# Altium PCB PH.PcbDoc
Units mm, origin at the board's own origin, x right, y up, seen from the top; angles counter-clockwise.
Board outline 50.1 x 34.1 mm, 2 copper layers (Top Layer, Bottom Layer); 44 components, 27 nets, 148 pads, 87 vias.
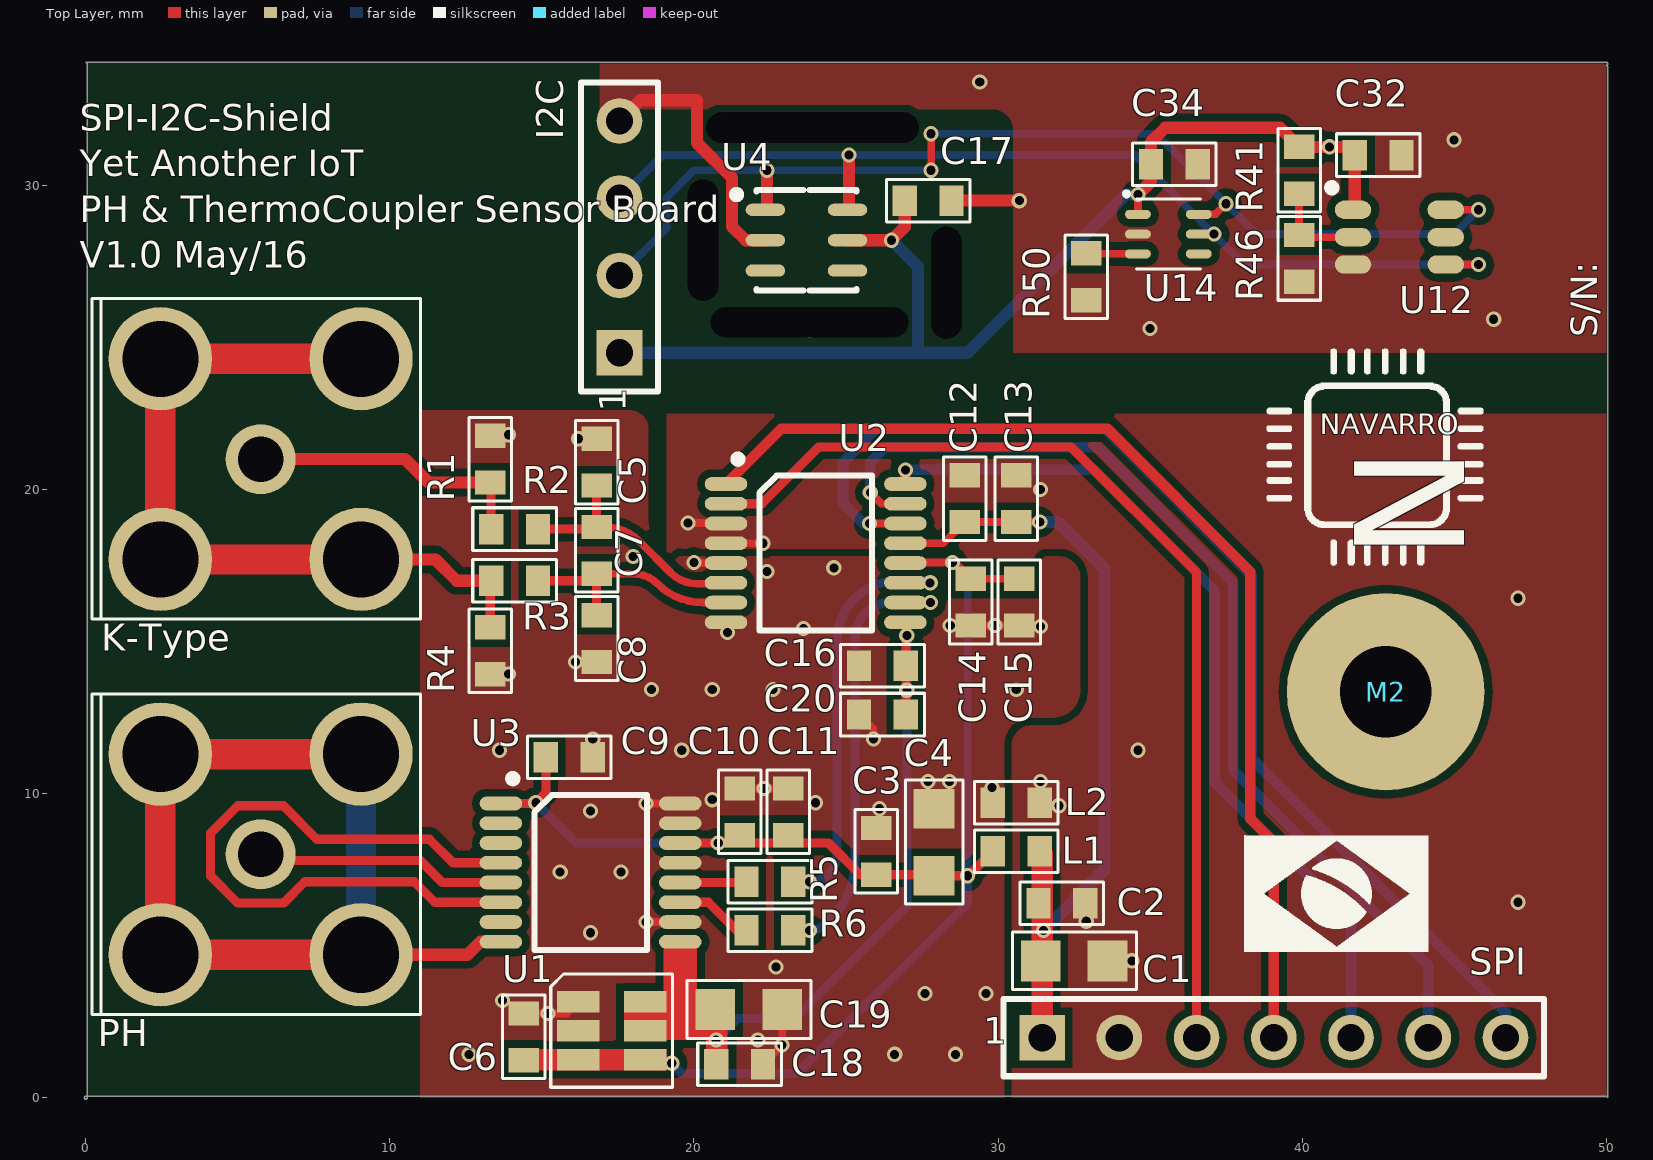
[diagram p0: Top Layer view]
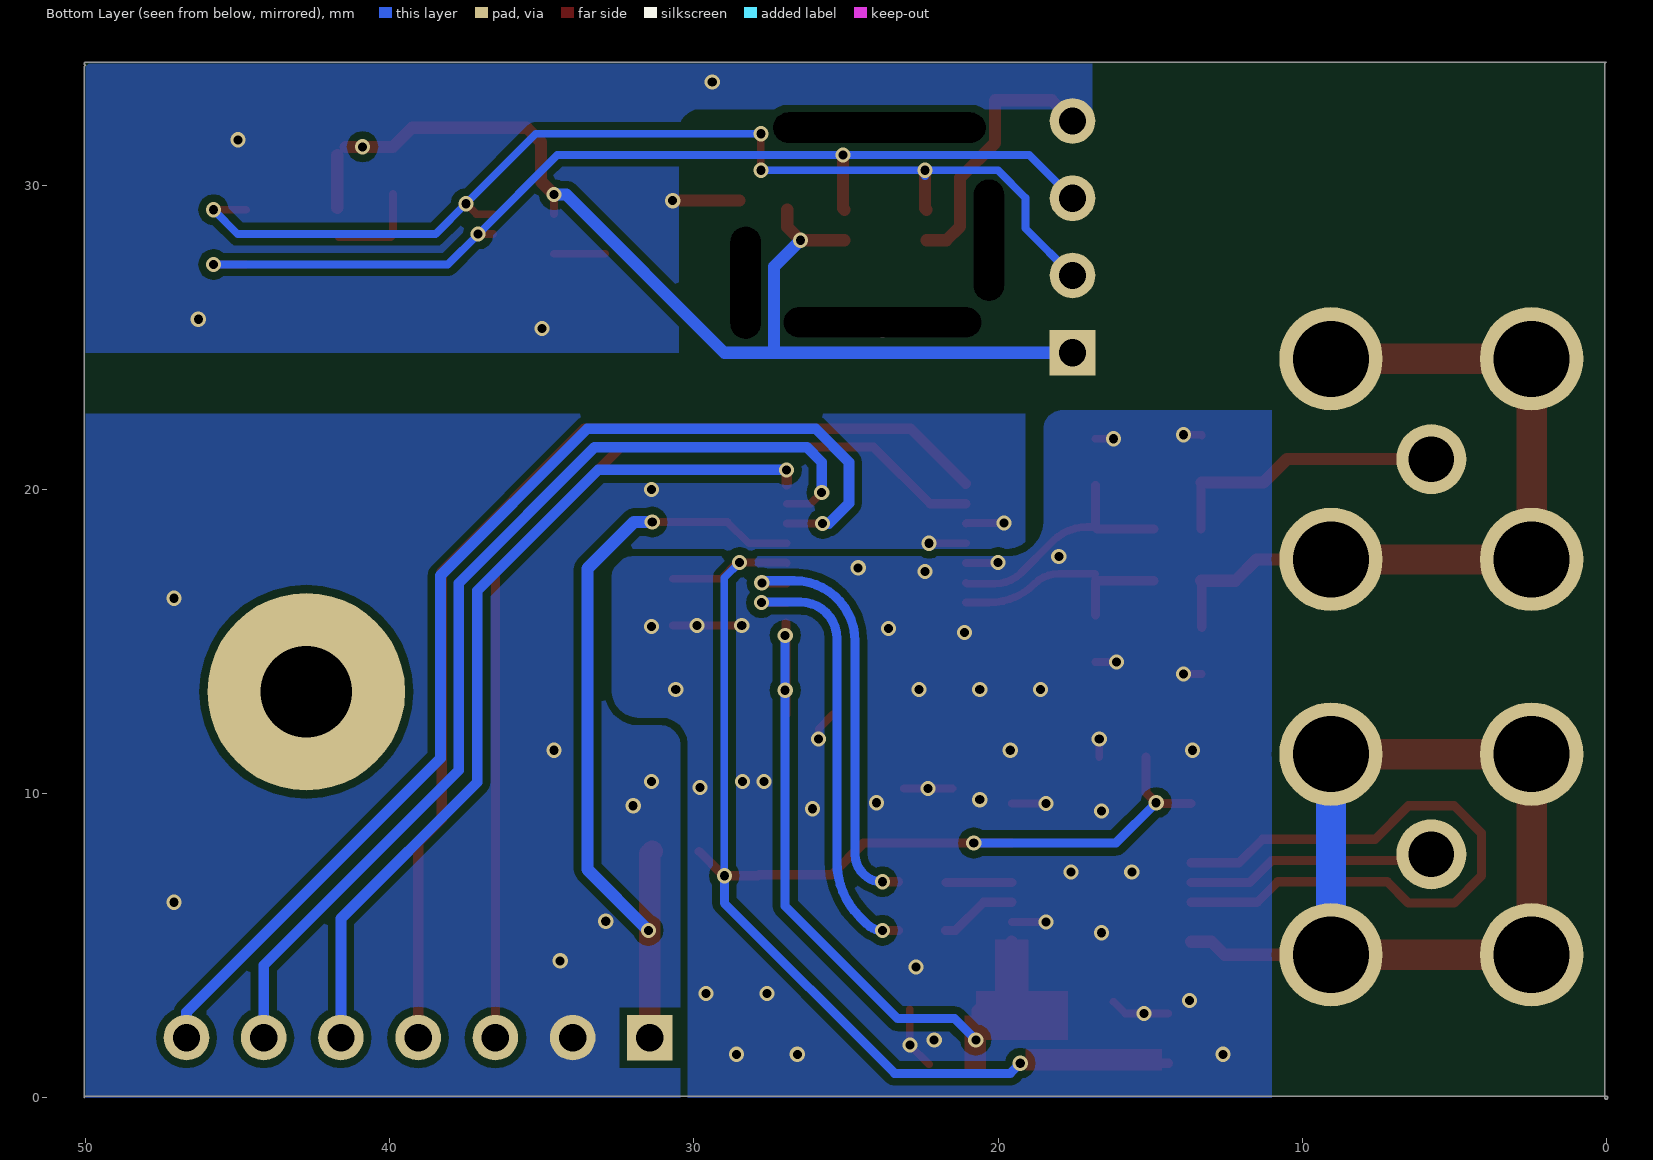
[diagram p1: Bottom Layer view, seen from below]
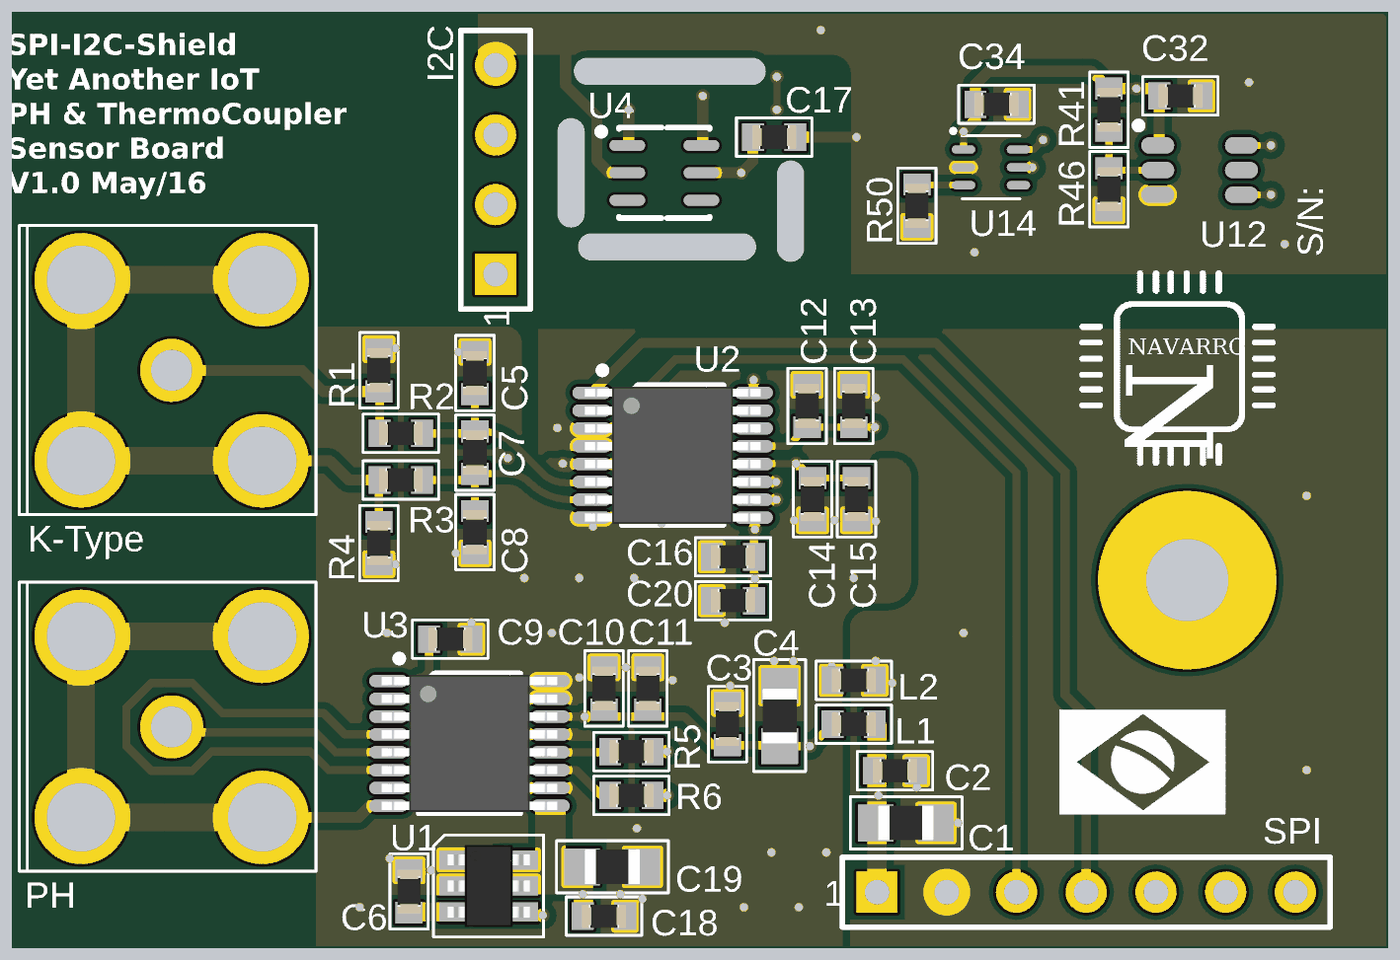
[diagram p2: 3D render of the assembled board from above, using the file's embedded part models]

## Layer stack, top to bottom
Top Solder: solder mask 0.0102, Solder Resist, Dk 3.5
Top Layer: signal copper 0.0356
Dielectric 1: dielectric 0.32, FR-4, Dk 4.8
Bottom Layer: signal copper 0.0356
Bottom Solder: solder mask 0.0102, Solder Resist, Dk 3.5

## Board outline
0,-0.05 cw(c0,0) -0.05,0 cw(c0,0) 0,0.05 50,0.05 cw(c50,0) 50.05,0 50.05,33.9 ccw(c50,33.9) 50.006,33.95 ccw(c50,34) 50.05,34 ccw(c50,34) 50,34.05 0,34.05 cw(c0,34) 0.05,34 0.05,0 cw(c0,0)

## Design rules (kind name [scope] priority, off if disabled: settings)
Clearance [All] p1: gap=0.254 ignorepadtopadclearanceinfootprint=FALSE except(0: Arc-Hole Track-Hole SMDPad-Hole THPad-Hole Via-Hole Fill-Hole Poly-Hole Region-Hole Text-Hole)
PolygonConnect [All] p1: connectstyle=Direct reliefconductorwidth=0.254 reliefentries=4 polygonreliefangle="90 Angle" airgapwidth=0.254
RoutingVias [All] p1: holewidth=0.711 width=1.27 viastyle="Through Hole" minholewidth=0.711 minwidth=1.27 maxholewidth=0.711 maxwidth=1.27
SolderMaskExpansion [All] p1: expansion=0.102
Width [All] p1: maxlimit=10 minlimit=0.254 preferedwidth=0.254
30 further rules are at their usual default settings.

## Components (designator, comment, footprint, x,y, rotation, side; value= is the part's Value field where it differs from the comment)
C1 "Capacitor Cerâmico" CC0805 32.5,4.5 r180 top
C2 "Capacitor Cerâmico" CC0603 32.1,6.4 r180 top
C3 "Capacitor Cerâmico" CC0603 26,8.1 r270 top
C4 "Capacitor Cerâmico" CC0805 27.9,8.4 r270 top
C5 "Capacitor Cerâmico" CC0603 16.8,20.9 r90 top
C6 "Capacitor Cerâmico" CC0603 14.4,2 r270 top
C7 "Capacitor Cerâmico" CC0603 16.8,18 r90 top
C8 "Capacitor Cerâmico" CC0603 16.8,15.1 r90 top
C9 "Capacitor Cerâmico" CC0603 15.9,11.2 r180 top
C10 "Capacitor Cerâmico" CC0603 21.5,9.4 r270 top
C11 "Capacitor Cerâmico" CC0603 23.1,9.4 r270 top
C12 "Capacitor Cerâmico" CC0603 28.9,19.7 r270 top
C13 "Capacitor Cerâmico" CC0603 30.6,19.7 r270 top
C14 "Capacitor Cerâmico" CC0603 29.1,16.3 r90 top
C15 "Capacitor Cerâmico" CC0603 30.7,16.3 r90 top
C16 "Capacitor Cerâmico" CC0603 26.2,14.2 r0 top
C17 "Capacitor Cerâmico" CC0603 27.7,29.5 r180 top
C18 "Capacitor Cerâmico" CC0603 21.5,1.1 r180 top
C19 "Capacitor Cerâmico" CC0805 21.8,2.9 r180 top
C20 "Capacitor Cerâmico" CC0603 26.2,12.6 r0 top
C32 "Capacitor Cerâmico" CC0603 42.5,31 r180 top
C34 "Capacitor Cerâmico" CC0603 35.8,30.7 r180 top
I2C "Header 4" "CONN HDR1X4" 17.55,24.5 r90 top locked
K-Type "Conn BNC" "CONN BNC-JACK" 5.75,21 r90 top (schematic designator K-Type1)
L1 "Bead" CC0603 30.6,8.1 r180 top
L2 "Bead" CC0603 30.6,9.7 r180 top
M2 "Furo de Fixação" Furo_M3 42.75,13.35 r0 top locked
PH "Conn BNC" "CONN BNC-JACK" 5.75,8 r90 top (schematic designator PH1)
R1 "Resistor" CC0603 13.3,21 r90 top
R2 "Resistor" CC0603 14.1,18.7 r180 top
R3 "Resistor" CC0603 14.1,17 r0 top
R4 "Resistor" CC0603 13.3,14.7 r270 top
R5 "Resistor" CC0603 22.5,7.1 r0 top
R6 "Resistor" CC0603 22.5,5.5 r0 top
R41 "Resistor" CC0603 39.9,30.5 r90 top
R46 "Resistor" CC0603 39.9,27.6 r90 top
R50 "Resistor" CC0603 32.9,27 r90 top
SPI "Header 7" "CONN HDR1X7" 31.45,1.975 r0 top locked
U1 "REF3220" SOT-23-6N 17.3,2.2 r0 top
U2 "ADS1120" TSSOP-16N 24.003,17.907 r0 top
U3 "LMP91200" TSSOP-16N 16.6,7.4 r0 top
U4 "SI7006" QFN3x3-6P 23.7,28.2 r0 top
U12 "TSL2561T" TSL2561-TMB6 43.2,28.3 r0 top
U14 "ISL29023" QFN2x2-6 35.6,28.4 r0 top

## Footprints (in the part's own frame and the unit in brackets; to place one, negate y for a bottom-side part, rotate by r counter-clockwise, add the part's x,y. Pads: shape width x height; smd on the part's side, far side on the other; paste and mask are expansions set on the pad)
CC0603 [mm] "Chip Resistor, 2-Leads, Body 1,6x0,8mm, IPC Medium Density"
  rect 0.8x1 smd: 1(-0.77,0) 2(0.77,0)
  silkscreen extent -1.38,-0.7 1.38,0.7, body extent -0.8,-0.42 0.8,0.43, height 0.45
CC0805 [mm] "Chip Resistor, 2-Leads, Body 2,0x1,2mm, IPC Medium Density"
  rect 1.3x1.35 smd: 1(-1.1,0) 2(1.1,0)
  silkscreen extent -2.05,-0.95 2.02,0.95, body extent -1,-0.62 1,0.63, height 0.6
"CONN BNC-JACK" [mm]
  round 2.3 hole 1.5: 1(0,0)
  round 3.4 hole 2.5: 2(-3.3,-3.3) 2(-3.3,3.3) 2(3.3,-3.3) 2(3.3,3.3)
  silkscreen extent -5.26,-5.26 5.28,5.55, body extent -5.16,-5.19 5.2,22.9, height 10.95
"CONN HDR1X4" [mm] "Connector; Header; 4 Position"
  rect 1.5x1.5 hole 0.9: 1(0,0)
  round 1.5 hole 0.9: 2(2.54,0) 3(5.08,0) 4(7.62,0)
  silkscreen extent -1.27,-1.27 8.89,1.27
"CONN HDR1X7" [mm] "Connector; Header; 7 Position"
  rect 1.5x1.5 hole 0.9: 1(0,0)
  round 1.5 hole 0.9: 2(2.54,0) 3(5.08,0) 4(7.62,0) 5(10.16,0) 6(12.7,0) 7(15.24,0)
  silkscreen extent -1.27,-1.27 16.51,1.27
Furo_M3 [mm] "Furo metalizado para parafuso M3"
  round 6.5 hole 3 paste+0: X(0,0)
QFN2x2-6 [mm]
  oval 0.85x0.3 smd: 1(-1,0.65) 2(-1,0) 3(-1,-0.65) 4(1,-0.65) 5(1,0) 6(1,0.65)
  silkscreen extent -1.42,-1.15 1.05,1.37, body extent -1.05,-1 1.05,1, height 0.75
QFN3x3-6P [mm]
  oval 1.3x0.4 smd: 1(-1.35,1) 2(-1.35,0) 3(-1.35,-1) 4(1.35,-1) 5(1.35,0) 6(1.35,1)
  silkscreen extent -2.42,-1.65 1.65,1.65, body extent -1.5,-1.5 1.5,1.5, height 1.21
SOT-23-6N [mm] "SOT23, 6-Leads, Body 3,1x2,7mm (max), Pitch 0,95mm, IPC Medium Density"
  rect 1.4x0.7 smd: 1(-1.1,0.95) 2(-1.1,0) 3(-1.1,-0.95) 4(1.1,-0.95) 5(1.1,0) 6(1.1,0.95)
  silkscreen extent -2.01,-1.86 2,1.86, body extent -1.5,-1.5 1.5,1.5, height 1.4
TSL2561-TMB6 [mm]
  oval 1.2x0.6 smd: 1(-1.525,0.9) 2(-1.525,0) 3(-1.525,-0.9) 4(1.525,-0.9) 5(1.525,0) 6(1.525,0.9)
  silkscreen extent -2.35,1.5 -2.1,1.75, body extent -1.9,-1.3 1.9,1.3, height 1.35
TSSOP-16N [mm]
  oval 1.4x0.45 smd: 1(-2.95,2.275) 2(-2.95,1.625) 3(-2.95,0.975) 4(-2.95,0.325) 5(-2.95,-0.325) 6(-2.95,-0.975) 7(-2.95,-1.625) 8(-2.95,-2.275) 9(2.95,-2.275) 10(2.95,-1.625) 11(2.95,-0.975) 12(2.95,-0.325) 13(2.95,0.325) 14(2.95,0.975) 15(2.95,1.625) 16(2.95,2.275)
  silkscreen extent -2.68,-2.55 1.85,3.22, body extent -3.2,-2.5 3.2,2.5, height 1.1

## Part data
C1 C4 C19: library part "Cap 10uF 25V 0805 X5R", "Capacitor (Semiconductor SIM Model)"
C2 C3 C6 C9 C10 C12 C13 C14 C15 C16 C17 C18 C20 C32 C34: library part "Cap 100nF 25V 0603 X7R", "Capacitor (Semiconductor SIM Model)"
C5 C7 C8: library part "Cap - $Val $V $Footprint $Classe_1", "Capacitor (Semiconductor SIM Model)"
C11: library part "Cap 1nF 50V 0603 NP0", "Capacitor (Semiconductor SIM Model)"
I2C: "Header, 4-Pin"
K-Type PH: "Conector BNC"
L1 L2: library part "Bd 1K@100MHz 0603 400mA"
M2: library part Parafuso, "Furo para parafuso"
R1 R2 R3 R4: library part "Res - $Val $% $Footprint $Pot"
R5 R6: library part "Res 1K 1% 0603 1/10W"
R41 R46: library part "Res 0R 0603 1/10W"
R50: library part "Res 499K 1% 0603 1/10W"
SPI: "Header, 7-Pin"
U1: "2.048v Precision Voltage Reference"
U2: library part ADS1120IPWR, "ADS1120 Low-Power, Low-Noise, 16-Bit ADC for Small-Signal Sensors"
U3: "AFE for Low-Power Chemical-Sensing Applications"
U4: "SI7021-A20-GM1"
U12 U14: "Lux Meter"

## Free pads (board coordinates)
  round 0 hole 1 slot 4 at 90 deg unplated paste+0 mask+0: 2(20.3,28.2)
  round 1 hole 1 slot 6.5 at 0 deg unplated paste+0 mask+0: 2(23.8,25.5)
  round 1 hole 1 slot 7 at 0 deg unplated paste+0 mask+0: 2(23.9,31.9)
  round 1 hole 1 slot 3.7 at 90 deg unplated paste+0 mask+0: 2(28.3,26.8)

## Via types
v1: diameter 0.5, hole 0.3, Top Layer to Bottom Layer, tented both sides, 87 vias

## Nets (pads, with @x,y where several pads share a name; then routed paths per layer and width w, separated by ;. In a path a pad name is that pad's centre, name@x,y a point inside that pad or via, vN(x,y) a via of type N, cw(c..) or ccw(c..) an arc to the next point about the centre after c; other vN are vias at no path point)
3V3: C17.2 C32.2 C34.2 I2C.1 R41.2 U4.5 U12.1 U14.1 | length 37.1
  Top Layer w0.254: U14.1 v1(34.6,29.7)
  Top Layer w0.4: U4.5 v1(26.5,28.2) 26.93,28.63 C17.2@26.93,29.2 ; v1(34.6,29.7) 35.03,30.13 C34.2 35.03,31.43 35.5,31.9 39.27,31.9 R41.2 v1(40.9,31.27) C32.2@41.46,31.27 ; U12.1@41.73,29.255 C32.2
  Bottom Layer w0.4: I2C.1 29,24.5 34.2,29.7 v1(34.6,29.7) ; v1(26.5,28.2) 27.37,27.33 27.37,24.5
AIN0: R5.2 U2.11 | length 14
  Top Layer w0.3: R5.2 v1(23.8,7.1) ; U2.11 v1(27.768,16.932)
  Bottom Layer w0.3: v1(23.8,7.1) 23.836,7.1 ccw(c23.836,7.911) 24.409,7.338 ccw(c23.8,8) 24.7,8 24.7,15 cw(c26.7,15) 26.7,17 v1@27.8,17
AIN1: R6.2 U2.10 | length 14.8
  Top Layer w0.3: R6.2 v1(23.8,5.5) ; U2.10 v1(27.782,16.282)
  Bottom Layer w0.3: v1(23.8,5.5) ccw(c23.8,6.224) 24.312,5.712 24.556,5.956 ccw(c22.76,7.752) 25.3,7.752 25.3,15.1 cw(c26.5,15.1) 26.5,16.3 v1@27.8,16.3
CS: SPI.3 U2.2 | length 33.3
  Top Layer w0.3: U2.2 22.232,19.532 24.1,21.4 32.4,21.4 36.53,17.27 SPI.3
DRDY: SPI.7 U2.14 | length 38
  Top Layer w0.254: v1@25.8,18.882 U2.14
  Bottom Layer w0.35: v1@25.572,18.882 24.9,19.554 24.9,20.9 26,22 33.508,22 38.336,17.172 38.336,11.164 46.69,2.81 SPI.7
  other v1: 25.768,18.882
GND: C1.1 C2.1 C12.1 C13.1 L2.1 SPI.2 U2.3 U2.4 | length 2.5
  Top Layer w0.254: v1(19.8,18.9) 21.035,18.9 U2.3 ; U2.4 v1(22.268,18.232)
  other v1: 34.4,4.5 32.9,5.8 47.1,6.425 32,9.6 31.4,10.4 34.6,11.425 47.1,16.425 31.4,20
GND_I2C: C17.1 C32.1 C34.1 I2C.4 R46.1 R50.1 U4.2 U12.3 U14.2 | length 10.9
  Top Layer w0.4: I2C.4 18.23,32.8 20.1,32.8 20.1,31.4 21.246,30.254 21.246,28.654 21.7,28.2 U4.2 ; C17.1@28.5,29.5 v1@30.63,29.5
  other v1: 35,25.3 46.3,25.6 30.7,29.5 45,31.5 29.4,33.4
GPH: C3.1 C4.1 C5.2 C6.1 C8.1 C9.1 C10.1 C11.1 C14.1 C15.1 C16.1 C18.1 C19.1 C20.1 L2.2 R1.2 R4.2 U1.1 U1.2 U2.5 U2.8 U3.10 U3.13 U3.15 U3.16 | length 15.3
  Top Layer w0.254: R4.2 v1(13.9,13.93) ; R1.2 13.3,21.8 v1(13.9,21.8) ; C6.1 15.82,2.77 U1.1 ; v1(16.1,14.33) C8.1 ; v1(16.2,21.67) C5.2 ; C9.1 v1(16.67,11.8) ; v1(18.425,5.775) U3.10 ; v1(18.425,9.675) U3.16 ; v1(20,17.6) 20.018,17.582 U2.5 ; C10.1 C11.1 ; C18.1 v1(22.9,1.73) C19.1 ; C20.1 25.9,12.13 v1(25.9,11.8) ; v1(28.43,15.53) C14.1 C15.1
  other v1: 12.6,1.425 26.6,1.425 28.6,1.425 22.1,1.9 15.2,2.77 13.7,3.2 27.6,3.425 29.6,3.425 22.7,4.3 16.6,5.425 15.6,7.425 17.6,7.425 16.6,9.425 26.1,9.5 24,9.7 20.6,9.8 22.3,10.17 29.8,10.2 27.7,10.4 28.4,10.4 13.6,11.425 19.6,11.425 18.6,13.425 20.6,13.425 22.6,13.425 30.6,13.425 21.1,15.3 23.6,15.425 31.4,15.5 29.9,15.53 22.4,17.3 24.6,17.425 18,17.8
KT1: C5.1 C7.2 R2.1 U2.6 | length 8.2
  Top Layer w0.254: C7.2 17.065,18.77 cw(c17.065,17.165) 18.2,18.3 19.246,17.254 ccw(c20.1,18.107) 20.1,16.9 20.976,16.9 ccw(c20.976,17.009) U2.6
  Top Layer w0.3: R2.1 16.73,18.7 C7.2 C5.1
KT2: C7.1 C8.2 R3.2 U2.7 | length 7.6
  Top Layer w0.254: C7.1 18.003,17.23 cw(c18.003,16.103) 18.8,16.9 ccw(c20.292,18.392) 20.292,16.282 U2.7
  Top Layer w0.3: R3.2 16.8,17 C8.2
MISO: SPI.6 U2.15 | length 33.9
  Top Layer w0.254: v1(25.8,19.9) 26.168,19.532 U2.15
  Bottom Layer w0.35: v1(25.8,19.9) 25.8,20.9 26.296,21.396 33.258,21.396 37.732,16.922 37.732,10.768 44.15,4.35 SPI.6
MOSI: SPI.5 U2.16 | length 28.8
  Top Layer w0.35: U2.16 v1(26.953,20.647)
  Bottom Layer w0.35: v1(26.953,20.647) 33.153,20.647 37.128,16.672 37.128,10.372 41.61,5.89 SPI.5
NetK-Type1_1: K-Type.1 R1.1 R2.2 | length 9.4
  Top Layer w0.3: R2.2 R1.1@13.33,20.2
  Top Layer w0.4: K-Type.1 10.5,21 11.27,20.23 R1.1
NetK-Type1_2: K-Type.2 R3.1 R4.1 | length 25.9
  Top Layer w0.3: R4.1 R3.1@13.3,16.97
  Top Layer w0.4: K-Type.2@9.05,17.7 11.5,17.7 12.2,17 R3.1
  Top Layer w1: K-Type.2@9.05,17.7 2.45,17.7 2.45,24.3 K-Type.2@9.05,24.3
NetPH1_1: PH.1 U3.5 | length 8
  Top Layer w0.3: PH.1@5.95,7.8 11,7.8 11.725,7.075 U3.5
NetPH1_2: PH.2 U3.8 | length 31.2
  Top Layer w0.4: PH.2@9.05,4.7 12.554,4.7 12.979,5.125 U3.8
  Top Layer w1: PH.2@9.05,4.7 2.45,4.7 2.45,11.3 PH.2@9.05,11.3
  Bottom Layer w1: PH.2@9.05,4.7 PH.2@9.05,11.3
NetR5_1: R5.1 U3.12 | length 2.2
  Top Layer w0.3: U3.12 R5.1@21.705,7.075
NetR6_1: R6.1 U3.11 | length 2.6
  Top Layer w0.3: U3.11 20.475,6.425 21.4,5.5 R6.1
NetR41_1: R41.1 R46.2 U12.2 | length 3.1
  Top Layer w0.254: R46.2 R41.1 ; R46.2@39.97,28.3 U12.2
NetR50_2: R50.2 U14.3 | length 1.7
  Top Layer w0.254: R50.2@32.92,27.75 U14.3
NetU3_4: U3.4 U3.6 | length 22.6
  Top Layer w0.3: U3.6 11.475,6.425 10.8,7.1 7.2,7.1 6.5,6.4 5,6.4 4.1,7.3 4.1,8.7 5,9.6 6.5,9.6 7.6,8.5 11.3,8.5 12.075,7.725 U3.4
SCK: SPI.4 U2.1 | length 35.6
  Top Layer w0.35: U2.1@21.057,20.186 22.871,22 33.6,22 38.3,17.3 38.3,9.17 39.07,8.4 SPI.4
SCL: I2C.3 U4.6 U12.4 U14.5 | length 33.8
  Top Layer w0.254: U14.5 v1(37.1,28.4) ; U12.4 v1(45.8,27.4)
  Top Layer w0.4: U4.6 25.1,29.25 v1(25.1,31)
  Bottom Layer w0.254: I2C.3 18.97,31 v1(25.1,31) ; v1@25.05,30.95 v1(25.1,31) ; v1(45.8,27.4) 38.1,27.4 v1(37.1,28.4) 34.5,31 v1(25.1,31)
SDA: I2C.2 U4.1 U12.6 U14.6 | length 36.8
  Top Layer w0.254: v1(27.8,30.5) v1(27.8,31.7) ; U14.6 37.15,29.05 v1(37.5,29.4) ; U12.6 v1(45.8,29.2)
  Top Layer w0.4: U4.1 22.4,29.25 v1(22.4,30.5)
  Bottom Layer w0.254: I2C.2 19.1,28.59 19.1,29.6 20,30.5 v1(22.4,30.5) ; v1@22.4,30.3 v1(22.4,30.5) ; v1(27.8,30.5) v1(22.4,30.5) ; v1(27.8,31.7) 35.2,31.7 v1(37.5,29.4) 38.5,28.4 45,28.4 v1(45.8,29.2)
VCC: C1.2 C2.2 C12.2 C13.2 L1.1 SPI.1 U2.13 | length 26.4
  Top Layer w0.254: U2.13 28.202,18.232 C12.2 C13.2 v1(31.37,18.93)
  Top Layer w0.7: L1.1 31.45,8.02 SPI.1
  Bottom Layer w0.4: v1(31.37,18.93) 31.97,18.93 33.5,17.4 33.5,7.5 v1(31.5,5.5)
VPH: C3.2 C4.2 C6.2 C9.2 C10.2 C11.2 C14.2 C15.2 L1.2 U1.3 U1.4 U2.12 U3.1 U3.14 | length 52.8
  Top Layer w0.254: U2.12 26.971,17.6 v1(28.5,17.6) 28.57,17.6 C14.2 C15.2
  Top Layer w0.3: U3.1 v1@14.775,9.675 ; C6.2@14.4,1.13 v1(19.27,1.13) ; v1(14.8,9.7) 15.13,10.03 C9.2 ; U3.14 v1(20.8,8.375) 24.425,8.375 25.47,7.33 C3.2 C4.2@27.87,7.33 ; C4.2 29.03,7.3 L1.2
  Bottom Layer w0.254: v1(28.5,17.6) 29,17.1 v1(29,7.3)
  Bottom Layer w0.3: v1(14.8,9.7) 16.125,8.375 v1(20.8,8.375) ; v1(19.27,1.13) 19.6,0.8 23.4,0.8 29,6.4 v1(29,7.3)
VREF: C16.2 C18.2 C19.2 C20.2 U1.5 U1.6 U2.9 U3.9 | length 26.2
  Top Layer w0.3: U1.5 U1.6 19.45,3.15 19.55,3.25 ; C19.2@20.45,3.15 C19.2 20.73,2.87 v1(20.73,1.9) C18.2 ; C20.2 C16.2 U2.9@26.97,15.615
  Top Layer w0.4: 19.55,3.25 U3.9
  Bottom Layer w0.3: v1(20.73,1.9) 21.43,2.6 23.3,2.6 27,6.3 v1(27,15.2)
  other v1: 27,13.4
pads on no net: M2.X U3.2 U3.3 U3.7 U4.3 U4.4 U12.5 U14.4

## Polygon pours and split planes (outlines as drawn)
GND on Top Layer "Top Layer-No Net" (solid, remove dead copper, pour order 4): 19.1,22.5 50,22.5 50,0 31.8,0 30,0 29.8,0.2 19.1,10.9 19.1,18.1
GPH on Top Layer "Top Layer-No Net" (solid, remove dead copper, pour order 0): 11,0 11,22.6 13,22.6 17.9,22.6 cw(c17.9,22) 18.5,22 18.5,19 ccw(c19.7,19) 19.7,17.8 32,17.8 cw(c32,17.1) 32.7,17.1 32.7,13.4 cw(c31.8,13.4) 31.8,12.5 31.1,12.5 ccw(c31.1,11.6) 30.2,11.6 30.2,0
GND_I2C on Top Layer "Top Layer-No Net" (solid, remove dead copper, pour order 10): 49.9,34 50,33.9 50,24.5 47.9,24.5 30.5,24.5 30.5,29.3 30.5,31.8 ccw(c29.8,31.8) 29.8,32.5 17.4,32.5 16.9,32.3 16.9,34 49.9,34
GND on Bottom Layer "Top Layer-No Net" (solid, remove dead copper, pour order 8): 19.1,22.5 50,22.5 50,0 31.8,0 30,0 29.8,0.2 19.1,10.9 19.1,18.1
GPH on Bottom Layer "Top Layer-No Net" (solid, remove dead copper, pour order 2): 11,0 11,22.6 13,22.6 17.9,22.6 cw(c17.9,22) 18.5,22 18.5,19 ccw(c19.7,19) 19.7,17.8 32,17.8 cw(c32,17.1) 32.7,17.1 32.7,13.4 cw(c31.8,13.4) 31.8,12.5 31.1,12.5 ccw(c31.1,11.6) 30.2,11.6 30.2,0
GND_I2C on Bottom Layer "Top Layer-No Net" (solid, remove dead copper, pour order 12): 49.9,34 50,33.9 50,24.5 47.9,24.5 30.5,24.5 30.5,29.3 30.5,31.8 ccw(c29.8,31.8) 29.8,32.5 17.4,32.5 16.9,32.3 16.9,34 49.9,34

## Other copper
Top Layer:
  rectangle net VPH: 14.6,0.9 19.1,1.6
  rectangle net VREF: 19,3 20.1,5.2
  rectangle net VREF: 20.4,0.8 21.1,2.7
  rectangle net VREF: 17.7,1.9 20.73,3.5

## Silkscreen, mask and mechanical layers (free items; w line width, h text height)
Top Overlay:
  drawing of 1816 lines, arcs and shapes, not listed
  text "SPI-I2C-Shield / Yet Another IoT / PH & ThermoCoupler Sensor Board / V1.0 May/16" at -0.2,27 h1.5
  text "S/N:" at 50,25 h1.5 r90
  text "NAVARRO" at 40.586,21.582 h1.15
  text "N" at 40.524,21.405 h6.22 r270
Mechanical 29:
  lines w0.1: 0,29.972 0,33.9 ; 34.29,0 50,0 ; 50,0 50,34 0,34 0,0 50,0

## Text inside footprints (layer, text, board x,y; h text height)
I2C: Top Overlay "1" at 18.046,22.565 h1.5 r90
SPI: Top Overlay "1" at 29.515,1.479 h1.5